# Altium PCB PCB_Kpad.PcbDoc
Units mm, origin at the board's own origin, x right, y up, seen from the top; angles counter-clockwise.
Board outline 94.26 x 100.27 mm, 2 copper layers (Top Layer, Bottom Layer), stack 1.534 mm thick; 22 components, 23 nets, 151 pads, 9 vias.
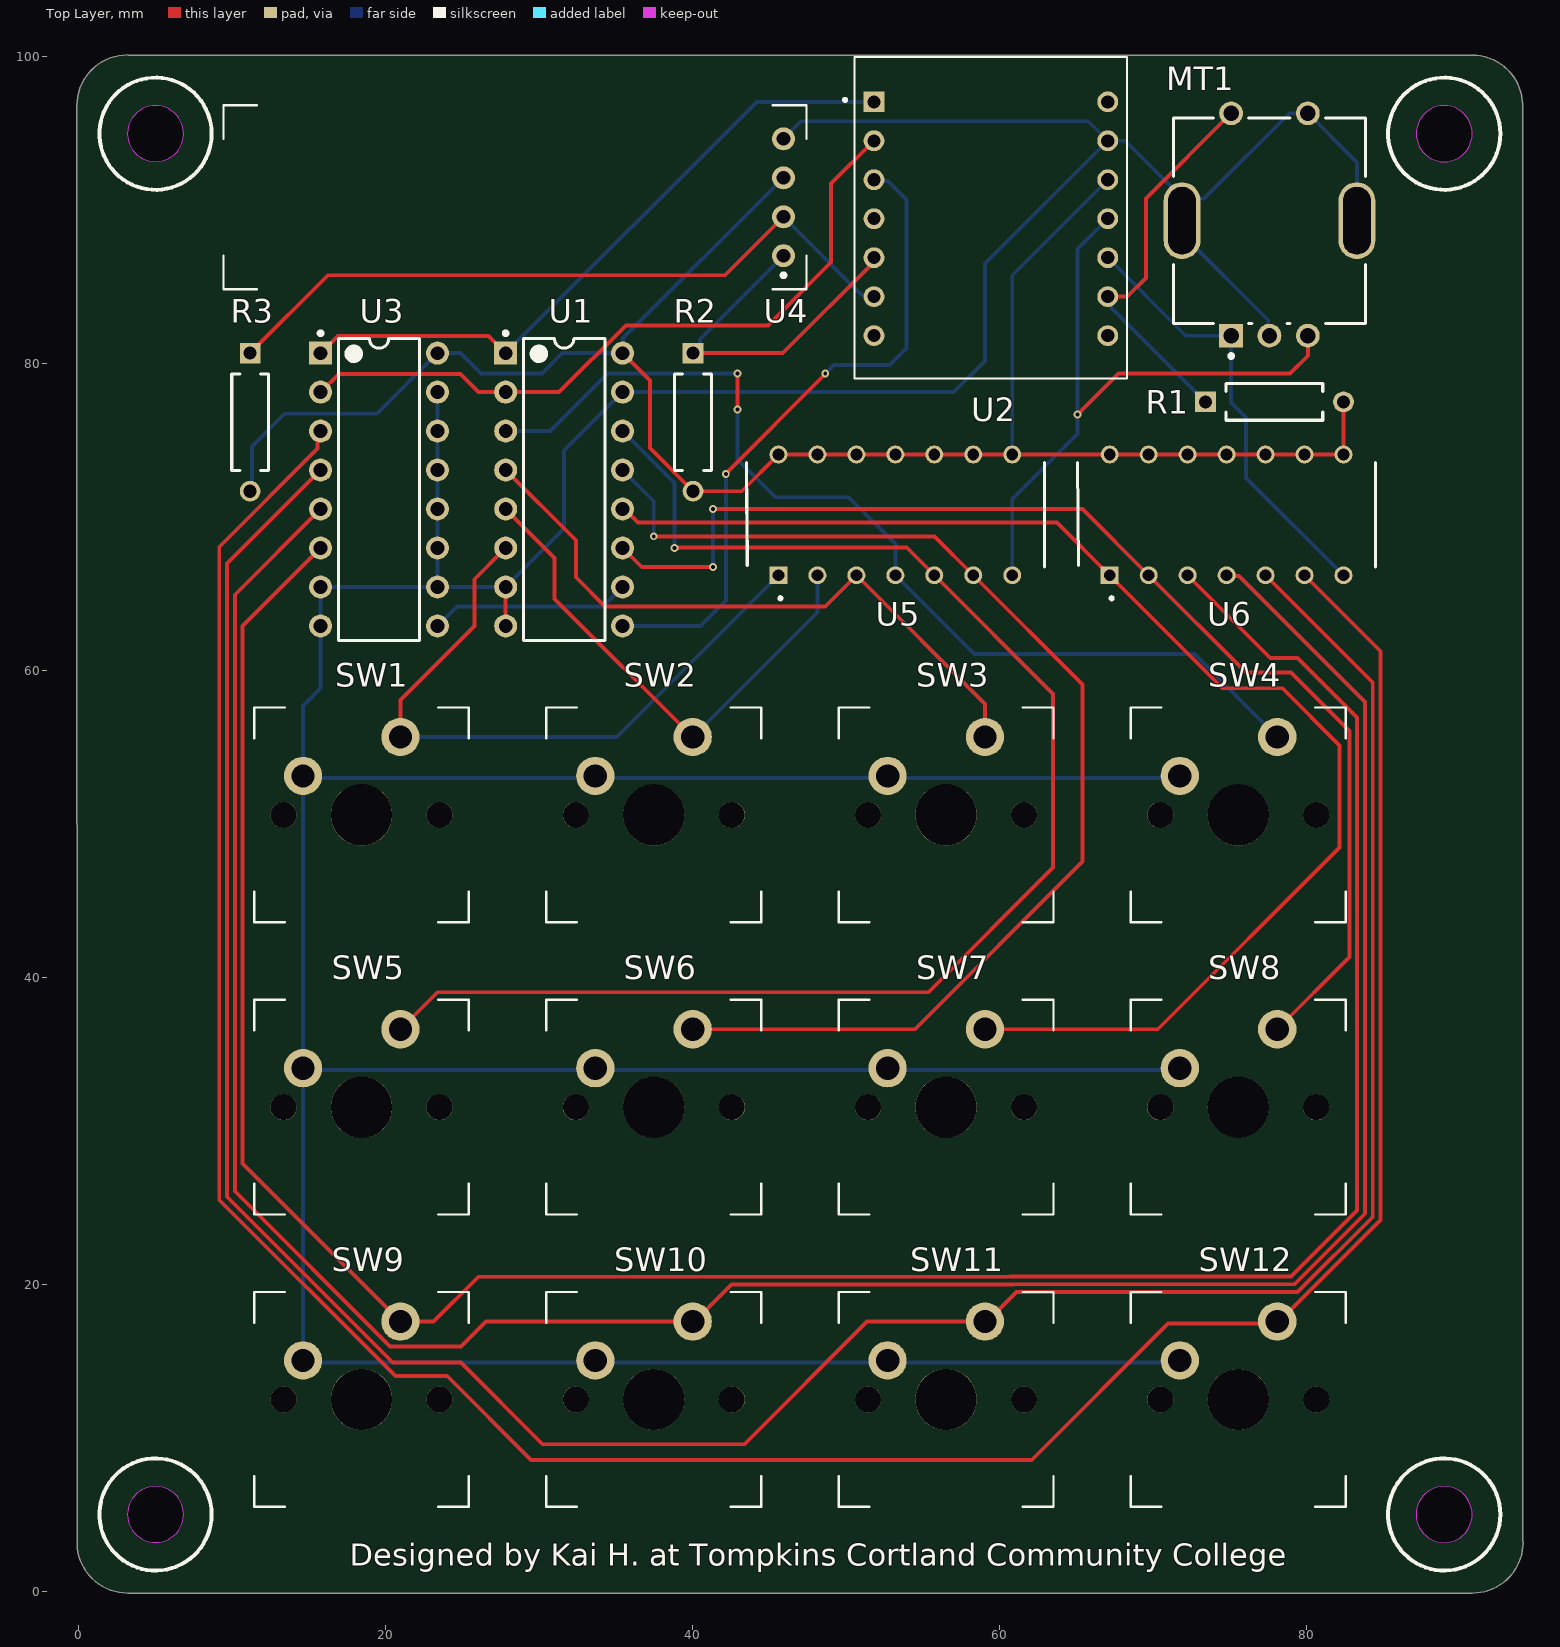
[diagram p0: Top Layer view]
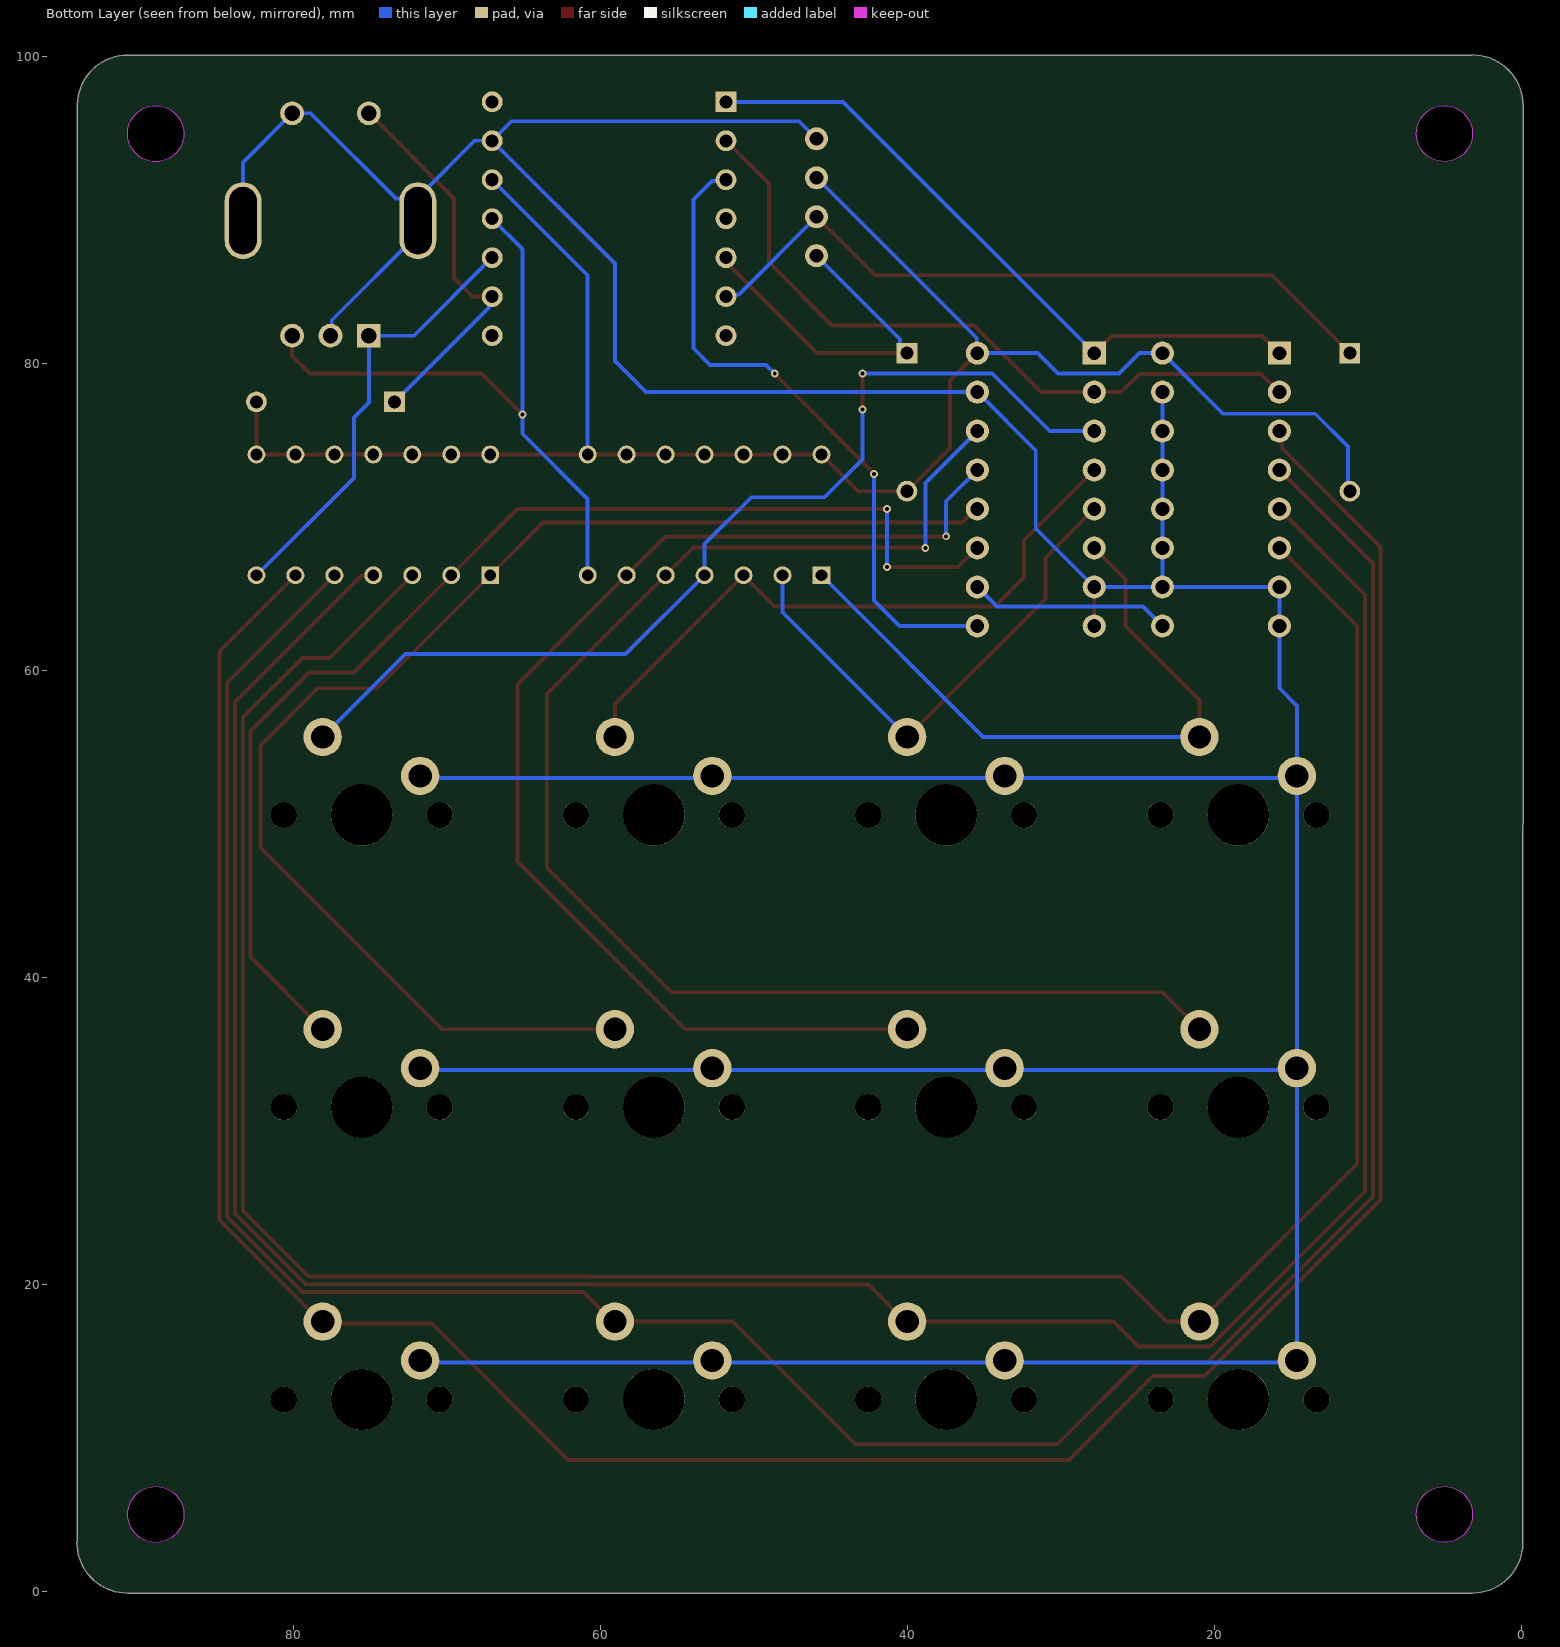
[diagram p1: Bottom Layer view, seen from below]

## Layer stack, top to bottom
Top Solder: solder mask 0.0127, Solder Resist, Dk 3.3
Top Layer: signal copper 0.0178
Dielectric1: core 1.4986, FR-4, Dk 4.3
Bottom Layer: signal copper 0.0178
Bottom Solder: solder mask 0.0127, Solder Resist, Dk 3.3

## Board outline
-0.116,3.122 ccw(c3.186,3.175) 3.184,-0.127 3.186,-0.127 90.835,-0.127 ccw(c90.835,3.175) 94.127,2.912 94.127,2.914 ccw(c90.835,3.175) 94.137,3.175 94.127,3.224 94.127,96.825 94.112,96.886 ccw(c90.81,96.825) 90.819,100.127 90.81,100.127 3.227,100.127 3.175,100.139 ccw(c3.175,96.837) -0.127,96.837
cut-out: 3.171,95.004 ccw(c5,95.004) 5,93.175 ccw(c5,95.004) 6.829,95.004 ccw(c5,95.004) 5,96.833 ccw(c5,95.004)
cut-out: 3.171,5.004 ccw(c5,5.004) 5,3.175 ccw(c5,5.004) 6.829,5.004 ccw(c5,5.004) 5,6.833 ccw(c5,5.004)
cut-out: 87.171,95 ccw(c89,95) 89,93.171 ccw(c89,95) 90.829,95 ccw(c89,95) 89,96.829 ccw(c89,95)
cut-out: 87.165,5 ccw(c88.994,5) 88.994,3.171 ccw(c88.994,5) 90.823,5 ccw(c88.994,5) 88.994,6.829 ccw(c88.994,5)

## Design rules (kind name [scope] priority, off if disabled: settings)
Clearance [All] p1: gap=0.254 ignorepadtopadclearanceinfootprint=FALSE
ComponentClearance ComponentClearance_1 [All] p1: gap=0.254 collisioncheckmode=3 verticalgap=0.254 showdistances=FALSE
DiffPairsRouting [All] p1: maxlimit=0.254 minlimit=0.254 mostfreqgap=0.254 toplayer_minwidth=0.254 toplayer_maxwidth=0.254 toplayer_prefwidth=0.254 bottomlayer_minwidth=0.254 bottomlayer_maxwidth=0.254 bottomlayer_prefwidth=0.254 maxuncoupledlength=12.7
HoleSize [All] p1: absolutevalues=TRUE maxlimit=7.62 minlimit=0.254 maxpercent=80.000 minpercent=20.000
MinimumAnnularRing [All] p1: minimumring=0.2
PasteMaskExpansion [All] p1: expansion=0.254
PlaneClearance [All] p1: clearance=0.381
PlaneConnect [All] p1: pad.planeconnectstyle=Relief pad.reliefexpansion=0.508 pad.reliefentries=4 pad.reliefconductorwidth=0.254 pad.reliefairgap=0.254 via.planeconnectstyle=Direct via.reliefexpansion=0.508 via.reliefentries=4 via.reliefconductorwidth=0.254 via.reliefairgap=0.254
PolygonConnect [All] p1: thpad.connectstyle=Relief thpad.reliefconductorwidth=0.254 thpad.reliefentries=4 thpad.polygonreliefangle="90 Angle" thpad.airgapwidth=0.254 smdpad.connectstyle=Relief smdpad.reliefconductorwidth=0.254 smdpad.reliefentries=4 smdpad.polygonreliefangle="90 Angle" smdpad.airgapwidth=0.254 via.connectstyle=Direct via.reliefconductorwidth=0.254 via.reliefentries=4 via.polygonreliefangle="90 Angle" via.airgapwidth=0.254
RoutingVias [All] p1: holewidth=0.254 width=0.508 viastyle="Through Hole" minholewidth=0.254 minwidth=0.508 maxholewidth=0.254 maxwidth=0.508
SMDNeckDown [All] p1: percent=100.000
SilkToSolderMaskClearance SilkscreenOverComponentPads [IsPad] p1: minsilkscreentomaskgap=0.254 clearancetoexposedcopper=TRUE
SolderMaskExpansion [All] p1: expansion=0.254 istentingtop=FALSE
Width [All] p1: maxlimit=0.254 minlimit=0.254 preferedwidth=0.254
23 further rules are at their usual default settings.

## Components (designator, comment, footprint, x,y, rotation, side; value= is the part's Value field where it differs from the comment)
MT1 "PEC11R-4215F-S0024" FP-PEC11R-4215F-S0024-MFG 77.607,89.332 r0 top
R1 "MFR-25FBF52-10K" RESA60-630X240 77.933,77.521 r0 top value=10k
R2 "MFR-25FBF52-10K" RESA60-630X240 40.035,76.196 r270 top value=10k
R3 "MFR-25FBF52-10K" RESA60-630X240 11.166,76.196 r270 top value=10k
SW1 "KS-8A10B055NW" KS-8A10B055NW-Footprint-1 18.425,50.597 r0 top
SW2 "KS-8A10B055NW" KS-8A10B055NW-Footprint-1 37.475,50.597 r0 top
SW3 "KS-8A10B055NW" KS-8A10B055NW-Footprint-1 56.525,50.597 r0 top
SW4 "KS-8A10B055NW" KS-8A10B055NW-Footprint-1 75.575,50.597 r0 top
SW5 "KS-8A10B055NW" KS-8A10B055NW-Footprint-1 18.425,31.547 r0 top
SW6 "KS-8A10B055NW" KS-8A10B055NW-Footprint-1 37.475,31.547 r0 top
SW7 "KS-8A10B055NW" KS-8A10B055NW-Footprint-1 56.525,31.547 r0 top
SW8 "KS-8A10B055NW" KS-8A10B055NW-Footprint-1 75.575,31.547 r0 top
SW9 "KS-8A10B055NW" KS-8A10B055NW-Footprint-1 18.425,12.497 r0 top
SW10 "KS-8A10B055NW" KS-8A10B055NW-Footprint-1 37.475,12.497 r0 top
SW11 "KS-8A10B055NW" KS-8A10B055NW-Footprint-1 56.525,12.497 r0 top
SW12 "KS-8A10B055NW" KS-8A10B055NW-Footprint-1 75.575,12.497 r0 top
U1 "SN74HC165N" TI-N0016A 31.633,71.806 r0 top
U2 "102010428" MODULE_102010428 59.446,89.459 r0 top
U3 "SN74HC165N" TI-N0016A 19.568,71.806 r0 top
U4 "8541549353" "New footprint 1" 45.93,87.046 r180 top
U5 "4114R-1-102LF" DIP794W45P254L1969H508Q14 53.223,70.153 r90 top value=1k
U6 "4114R-1-102LF" DIP794W45P254L1969H508Q14 74.813,70.153 r90 top value=1k

## Footprints (in the part's own frame and the unit in brackets; to place one, negate y for a bottom-side part, rotate by r counter-clockwise, add the part's x,y. Pads: shape width x height; smd on the part's side, far side on the other; paste and mask are expansions set on the pad)
DIP794W45P254L1969H508Q14 [mm]
  rect 1.17x1.17 / inner round 1.17 / far side rect 1.17x1.17 hole 0.77: 1(-3.935,7.62)
  round 1.17 hole 0.77: 2(-3.935,5.08) 3(-3.935,2.54) 4(-3.935,0) 5(-3.935,-2.54) 6(-3.935,-5.08) 7(-3.935,-7.62) 8(3.935,-7.62) 9(3.935,-5.08) 10(3.935,-2.54) 11(3.935,0) 12(3.935,2.54) 13(3.935,5.08) 14(3.935,7.62)
  silkscreen extent -5.54,-9.71 3.41,9.71, body extent -4.45,-9.72 4.19,9.71, height 4.64
FP-PEC11R-4215F-S0024-MFG [mm]
  round 1.55 hole 1 paste-2539.97 mask+0: 1(-2.5,7) 2(2.5,7) B(2.5,-7.5) C(0,-7.5)
  rrect100% 2.4x5 hole 4.4 slot 1.8 at 0 deg paste-2539.97 mask+0: 3(-5.7,0) 4(5.7,0)
  rect 1.55x1.55 hole 1 paste-2539.97 mask+0: A(-2.5,-7.5)
  silkscreen extent -6.25,-8.95 6.25,6.7, body extent -7,-8.37 7,7.88, height 0.25
KS-8A10B055NW-Footprint-1 [mm]
  round 2.5 hole 1.524: 1(-3.81,2.54) 2(2.54,5.08)
  round 1.7 hole 1.7 unplated mask+0: ""(-5.08,0) ""(5.08,0)
  round 4 hole 4 unplated mask+0: ""(0,0)
  silkscreen extent -7,-7 7,7
MODULE_102010428 [mm]
  rect 1.358x1.358 / inner round 1.358 / far side rect 1.358x1.358 hole 0.85: 1(-7.62,7.62)
  round 1.358 hole 0.85: 2(-7.62,5.08) 3(-7.62,2.54) 4(-7.62,0) 5(-7.62,-2.54) 6(-7.62,-5.08) 7(-7.62,-7.62) 8(7.62,-7.62) 9(7.62,-5.08) 10(7.62,-2.54) 11(7.62,0) 12(7.62,2.54) 13(7.62,5.08) 14(7.62,7.62)
  silkscreen extent -9.6,-10.41 8.89,10.54, body extent -8.89,-10.41 8.89,12.05, height 4.21
"New footprint 1" [mm]
  round 1.5 hole 0.9: S1(0,0) S2(0,-2.54) S3(0,-5.08) S4(0,-7.62)
  silkscreen extent -1.5,-9.81 36.5,2.19
RESA60-630X240 [mm] "Axial Resistor, 2-Leads, Dia 2.4mm, Body Length 6.3mm"
  rect 1.35x1.35 hole 0.85: 1(-4.5,0)
  round 1.35 hole 0.85: 2(4.5,0)
  silkscreen extent -3.15,-1.2 3.15,1.2, body extent -4.77,-1.19 4.77,1.2, height 2.4
TI-N0016A [mm] "DIP, 16-Leads, Body 19.7x6.6mm, Pitch 2.54mm"
  rect 1.5x1.5 hole 0.9: 1(-3.81,8.89)
  round 1.5 hole 0.9: 2(-3.81,6.35) 3(-3.81,3.81) 4(-3.81,1.27) 5(-3.81,-1.27) 6(-3.81,-3.81) 7(-3.81,-6.35) 8(-3.81,-8.89) 9(3.81,-8.89) 10(3.81,-6.35) 11(3.81,-3.81) 12(3.81,-1.27) 13(3.81,1.27) 14(3.81,3.81) 15(3.81,6.35) 16(3.81,8.89)
  silkscreen extent -3.93,-9.85 2.65,10.31, body extent -3.95,-9.85 3.95,9.85, height 5.08

## Part data
MT1: library part CMP-033-000000-5, "Incremental Encoder, 12 Mm, Contact Rating 10 Ma - 5 Vdc", Package=None, Availability=Unavailable, Component Type=Standard, Design Item ID=PEC11R-4215F-S0024, MP=PEC11R-4215F-S0024, Pin Count=7, Price=None, RoHS Compliant=Yes, Source=PEC11R-4215F-S0024.SchLib
R1 R2 R3: library part CMP-009-00047-4, "Axial Resistor, 10 KOhm, +/- 1%, 0.25 W, -55 to 155 degC, 2-Pin THD, RoHS, Bulk", Case/Package=Axial, Manufacturer=Yageo, Max Operating Temperature=155°C, Min Operating Temperature=-55°C, Package Description="2-Pin Axial Lead, Dia 2.4 mm, Body Length 6.3 mm", Package Quantity=200, Package Reference=MFR-25, Power=250mW, Tolerance=1%, Voltage Rating=250V, Datasheet URL=http://www.yageo.com/documents/recent/Yageo%20LR_MFR_2013.pdf, Datasheet Version=Apr-13, Manufacturer URL=http://www.yageo.com/, Mounting Technology=TH, Packaging=Bulk, RoHS Compliant=True
SW1 SW2 SW3 SW4 SW5 SW6 SW7 SW8 SW9 SW10 SW11 SW12: library part CMP-011-00015-11, "SPST momentary switch 15.40mmx15.40mm", Current Rating=10mA, Max Operating Temperature=80°C, Min Operating Temperature=-40°C, Voltage Rating=12V, ComponentLink1Description=Datasheet, ComponentLink1URL=https://gateron.com/u_file/2311/10/file/GATERONOilkingswitch-KS-8A10B055NW-D53.pdf, Max Current Rating=10mA, Mounting Technology=TH, Pins=4, Throw Configuration=SPST
U1 U3: library part CMP-016-00000-3, "Parallel-Load Shift Register, 8-Bit, 2 to 6 V, -40 to 125 degC, 16-Pin PDIP (N), Pb-Free (RoHS), Rail/Tube", Case/Package=PDIP, Manufacturer="Texas Instruments", Max Operating Temperature=85°C, Max Ouput Current=5.2mA, Max Supply Voltage=6V, Min Operating Temperature=-40°C, Min Supply Voltage=2V, Nominal Supply Voltage=5V, Package Description="16-Pin Plastic Double In-line Package, Body 19.305 x 6.35 mm, Pitch 2.54 mm", Package Quantity=25, Package Reference=PDIP-16, Package Version="4040049/E, 12/2002", Datasheet URL=http://www.ti.com/lit/ds/symlink/sn74hc165.pdf, Datasheet Version="SCLS116H, 12/2015", Direction=Unidirectional, Elements=1, Logic Function=ShiftRegister, Manufacturer URL=http://www.ti.com/, Mounting Technology=TH, Output Current=5.2mA, Package URL=http://www.ti.com/lit/ml/mpdi002c/mpdi002c.pdf, Packaging=Rail/Tube, Pins=16, Propagation Delay=150ns, RoHS Compliant=True
U2: library part CMP-031-000000-2, "RP2040 XIAO RP2040 series ARMÂ® CortexÂ®-M0+ MCU 32-Bit Embedded Evaluation Board", Package=None, Check_prices=https://www.snapeda.com/parts/102010428/Seeed+Technology+Co.%252C+Ltd/view-part/?ref=eda, Component Type=Standard, Design Item ID=102010428, MF="Seeed Technology Co., Ltd", MP=102010428, Pin Count=14, SnapEDA_Link=https://www.snapeda.com/parts/102010428/Seeed+Technology+Co.%252C+Ltd/view-part/?ref=snap, Source=102010428.SchLib
U4: library part CMP-003-000002-6, "MakerFocus 2pcs I2C OLED Display Module 0.91 Inch"
U5 U6: library part CMP-009-00186-1, "RES ARRAY 7 RES 1K OHM 14DIP", Case/Package=7731, Element Power Dissipation=250mW, First Element Resistance=1kR, Manufacturer 1=Bourns, Manufacturer Series=4100R, Max Operating Temperature=125°C, Min Operating Temperature=-55°C, Package=PDIP-14, Package Height=4.57mm, Package Length=19.43mm, Package Shape=Rectangular, Package Style=DIPMeter, Package Width=7.87mm, Rated Temperature=70°C, Resistor Type="ARRAY/NETWORK RESISTOR", Temperature Coefficient=100ppm/°C, Temperature Coefficient Tracking=50ppm/°C, Tolerance=2%, Working Voltage=100V, Channels=7, Check_prices=https://www.snapeda.com/parts/SN74LS90N/Texas%20Instruments/view-part/386057/?ref=eda, Component Type=Standard, ComponentLink1Description=Datasheet, ComponentLink1URL=https://www.bourns.com/docs/Product-Datasheets/4100R.pdf, Construction=Molded, Design Item ID=4114R-1-102LF, Digi-Key_Part_Number=4114R-1-102LF-ND, JESD-609 Code=e3, Lead Length=3.43mm, Lead Pitch=2.54mm, Manufacturer Part Number 1=4114R-1-102LF, Mounting Technology="Through Hole", Network Type=Isolated, Number of Elements=1, Pin Count=12, Pins=14, Power=250mW, Reach SVHC Compliant=No, RoHS Compliant=Yes, Series=4100R, Technology="METAL GLAZE/THICK FILM", Terminal Finish=Tin, Termination=Flat

## Via types
v1: diameter 0.508, hole 0.254, Top Layer to Bottom Layer, 9 vias

## Nets (pads, with @x,y where several pads share a name; then routed paths per layer and width w, separated by ;. In a path a pad name is that pad's centre, name@x,y a point inside that pad or via, vN(x,y) a via of type N, cw(c..) or ccw(c..) an arc to the next point about the centre after c; other vN are vias at no path point)
3V3: R1.2 R2.2 R3.2 U1.16 U2.12 U3.16 U4.S3 U5.8 U5.9 U5.10 U5.11 U5.12 U5.13 U5.14 U6.8 U6.9 U6.10 U6.11 U6.12 U6.13 U6.14 | length 124.7
  Top Layer w0.254: U1.16 37.221,78.918 37.221,74.51 R2.2 43.211,71.696 U5.14 U5.13 U5.12 U5.11 U5.10 U5.9 U5.8 U6.14 U6.13 U6.12 U6.11 U6.10 U6.9 U6.8 R1.2
  Bottom Layer w0.254: R3.2 11.295,71.825 11.295,74.625 13.417,76.747 19.429,76.747 U3.16 24.872,80.696 26.206,79.362 30.179,79.362 31.513,80.696 U1.16 35.482,80.735 35.482,81.678 U4.S3 ; U5.8 60.843,85.776 U2.12
CLK: U1.2 U2.2 U3.2 | length 46.8
  Top Layer w0.254: U3.2 16.948,79.346 24.874,79.346 26.064,78.156 U1.2 31.304,78.156 35.655,82.508 44.918,82.508 49.032,86.621 49.032,91.745 U2.2
ENC_CLK: MT1.A U2.10 U6.7 | length 28.8
  Bottom Layer w0.254: U2.10 72.153,81.832 MT1.A 75.107,77.488 76.083,76.512 76.083,72.568 U6.7
ENC_DT: MT1.B U2.11 U5.7 | length 43.7
  Top Layer w0.254: v1(65.098,76.696) 67.764,79.362 78.94,79.362 80.107,80.529 MT1.B
  Bottom Layer w0.254: U5.7 60.843,71.188 65.098,75.443 v1(65.098,76.696) 65.098,87.491 U2.11
ENC_SW: MT1.1 R1.1 U2.9 | length 25.5
  Top Layer w0.254: U2.9 68.336,84.379 69.559,85.602 69.559,90.784 MT1.1
  Bottom Layer w0.254: U2.9 67.277,84.168 67.277,83.677 R1.1
GND: MT1.2 MT1.3 MT1.4 MT1.C SW1.1 SW2.1 SW3.1 SW4.1 SW5.1 SW6.1 SW7.1 SW8.1 SW9.1 SW10.1 SW11.1 SW12.1 U1.7 U1.8 U1.15 U2.13 U3.7 U3.8 U3.10 U3.11 U3.12 U3.13 U3.14 U3.15 U4.S4 | length 367.6
  Top Layer w0.254: U1.8 U1.7
  Bottom Layer w0.254: SW5.1@14.615,33.96 SW9.1 14.742,14.91 33.538,14.91 SW10.1 33.792,14.91 52.588,14.91 SW11.1 52.842,14.91 71.638,14.91 SW12.1 ; SW1.1@14.615,53.01 SW5.1 14.742,33.96 33.538,33.96 SW6.1 33.792,33.96 52.588,33.96 SW7.1 52.842,33.96 71.638,33.96 SW8.1 ; U3.15@23.378,78.29 U3.15 U3.14 U3.13 U3.12 U3.11 U3.10 ; U4.S4 47.073,95.809 65.796,95.809 U2.13 ; SW4.1 71.638,53.01 52.842,53.01 SW3.1 52.588,53.01 33.792,53.01 SW2.1 33.538,53.01 14.742,53.01 SW1.1 14.615,57.709 15.758,58.852 U3.8 U3.7 U3.10 ; MT1.C 77.526,81.913 77.526,82.839 71.907,88.458 MT1.3 MT1.3@71.907,89.773 ; MT1.4 83.307,93.132 MT1.2 78.907,96.332 73.339,90.764 72.898,90.764 MT1.3@71.907,89.773 ; U3.10 U1.7 31.633,69.266 31.633,74.346 U1.15 57.029,78.156 59.065,80.192 59.065,86.538 U2.13 ; U2.13 68.209,94.539 71.907,90.841 MT1.3@71.907,89.773
LD: U1.1 U2.1 U3.1 | length 43.8
  Top Layer w0.254: U3.1 16.889,81.827 26.692,81.827 U1.1
  Bottom Layer w0.254: U1.1 44.206,97.079 U2.1
SCL: R3.1 U2.6 U4.S2 | length 46.5
  Top Layer w0.254: R3.1 16.245,85.775 42.119,85.775 U4.S2
  Bottom Layer w0.254: U4.S2 50.986,84.53 51.675,84.53 U2.6
SDA: R2.1 U2.5 U4.S1 | length 23.3
  Top Layer w0.254: R2.1 45.886,80.696 51.826,86.636 U2.5
  Bottom Layer w0.254: R2.1 40.487,81.148 40.487,81.603 U4.S1
SER: U1.10 U3.9 | length 13.1
  Bottom Layer w0.254: U3.9 24.648,64.186 34.173,64.186 U1.10
SH_Data: U1.9 U2.3 | length 43.2
  Top Layer w0.254: v1(42.174,72.822) 42.174,72.853 48.651,79.33 v1(48.651,79.362)
  Bottom Layer w0.254: U1.9 40.526,62.916 42.174,64.564 v1(42.174,72.822) ; v1(48.651,79.362) 49.223,79.934 52.86,79.934 53.941,81.015 53.941,90.704 52.732,91.914 51.911,91.914 U2.3
SW1: SW1.2 U1.6 U5.1 | length 44.2
  Top Layer w0.254: SW1.2 20.965,58.09 25.784,62.909 25.784,65.957 U1.6
  Bottom Layer w0.254: SW1.2 35.062,55.677 U5.1
SW2: SW2.2 U1.5 U5.2 | length 33.8
  Top Layer w0.254: U1.5 31.01,67.349 31.01,64.682 SW2.2
  Bottom Layer w0.254: SW2.2 48.143,63.805 U5.2
SW3: SW3.2 U1.4 U5.3 | length 42.8
  Top Layer w0.254: U1.4 32.395,68.504 32.395,66.091 34.3,64.186 48.651,64.186 U5.3 59.065,57.836 SW3.2
SW4: SW4.2 U1.3 U5.4 | length 66.1
  Top Layer w0.254: v1(42.936,77.021) v1(42.936,79.362)
  Bottom Layer w0.254: U1.3 30.724,75.616 34.47,79.362 v1(42.936,79.362) ; v1(42.936,77.021) 42.936,73.771 45.401,71.306 50.171,71.306 53.223,68.254 U5.4 58.366,61.075 72.717,61.075 SW4.2
SW5: SW5.2 U1.14 U5.5 | length 95.9
  Top Layer w0.254: SW5.2 23.378,39.04 55.382,39.04 63.51,47.168 63.51,58.471 U5.5 53.963,68.018 38.857,68.018 v1(38.835,67.996)
  Bottom Layer w0.254: U1.14 38.835,72.224 v1(38.835,67.996)
SW6: SW6.2 U1.13 U5.6 | length 78.6
  Top Layer w0.254: v1(37.475,68.758) 55.763,68.758 U5.6 65.415,59.106 65.415,47.549 54.493,36.627 SW6.2
  Bottom Layer w0.254: U1.13 37.475,71.044 v1(37.475,68.758)
SW7: SW7.2 U1.12 U6.1 | length 87.8
  Top Layer w0.254: U1.12 35.562,70.536 36.451,69.647 63.764,69.647 U6.1 74.559,58.852 78.446,58.852 82.179,55.119 82.179,48.478 70.328,36.627 SW7.2
SW8: SW8.2 U1.11 U6.2 | length 79.1
  Top Layer w0.254: U1.11 36.691,66.748 v1(41.335,66.748) ; v1(41.335,70.536) 42.936,70.536 65.415,70.536 U6.2 76.083,59.868 79.004,59.868 82.814,56.058 82.814,41.326 SW8.2
  Bottom Layer w0.254: v1(41.335,66.748) v1(41.335,70.536)
SW9: SW9.2 U3.6 U6.3 | length 169.2
  Top Layer w0.254: U3.6 10.678,62.916 10.678,27.864 SW9.2 23.124,17.577 26.045,20.498 60.676,20.498 60.691,20.513 79.023,20.513 83.322,24.812 83.322,56.947 79.434,60.835 77.656,60.835 U6.3
SW10: SW10.2 U3.5 U6.4 | length 174
  Top Layer w0.254: U3.5 10.17,64.948 10.17,26.065 20.289,15.946 24.922,15.946 26.553,17.577 SW10.2 40.142,17.577 42.555,19.99 60.887,19.99 60.902,20.005 79.233,20.005 83.83,24.602 83.83,57.963 75.623,66.17 74.861,66.17 U6.4
SW11: SW11.2 U3.4 U6.5 | length 182.2
  Top Layer w0.254: U3.4 9.662,66.98 9.662,25.708 20.46,14.91 24.902,14.91 30.236,9.576 43.383,9.576 51.384,17.577 SW11.2@59.192,17.577 ; SW11.2 SW11.2@59.192,17.577 ; U6.5 84.338,59.233 84.338,24.391 79.444,19.497 61.112,19.497 SW11.2@59.192,17.577
SW12: SW12.2 U3.3 U6.6 | length 186.1
  Top Layer w0.254: U3.3 15.568,75.426 15.568,74.485 9.154,68.071 9.154,25.498 20.631,14.021 24.013,14.021 29.474,8.56 62.113,8.56 71.003,17.45 77.988,17.45 SW12.2 78.242,17.577 84.846,24.181 84.846,61.265 U6.6
pads on no net: SW1. SW2. SW3. SW4. SW5. SW6. SW7. SW8. SW9. SW10. SW11. SW12. U2.4 U2.7 U2.8 U2.14

## Silkscreen, mask and mechanical layers (free items; w line width, h text height)
Top Overlay:
  circle w0.254: c5,95 r3.658
  circle w0.254: c5,5 r3.658
  circle w0.254: c89,95 r3.658
  circle w0.254: c89,5 r3.658
  text "Designed by Kai H. at Tompkins Cortland Community College" at 17.663,1.172 h2.5
Board:
  lines w0.254: 0,3.175 0,96.837 cw(c3.175,96.837) 3.175,100.011 ; 0.011,3.175 ccw(c3.186,3.175) 3.186,0 90.835,0 ccw(c90.835,3.175) 94.01,3.175 ; 2.905,100 90.81,100 cw(c90.81,96.825) 93.985,96.825 ; 94,2.923 94,96.825
Drill Drawing:
  circle w0.35: c117.268,74.378 r0.847
  lines w0.35: 116.421,66.758 117.268,65.911 118.115,66.758 117.268,67.605 116.421,66.758 ; 116.421,71.415 118.115,71.415 117.268,69.721 116.421,71.415 ; 116.421,77.341 118.115,77.341 118.115,79.035 116.421,79.035 116.421,77.341 ; 116.421,81.151 116.421,81.575 116.845,81.998 116.421,82.421 116.421,82.845 116.845,82.845 117.268,82.421 117.691,82.845 118.115,82.845 118.115,82.421 117.691,81.998 118.115,81.575 118.115,81.151 117.691,81.151 117.268,81.575 116.845,81.151 116.421,81.151 ; 116.421,84.961 117.268,85.385 118.115,84.961 117.691,85.808 118.115,86.655 117.268,86.231 116.421,86.655 116.845,85.808 116.421,84.961 ; 116.421,89.195 116.845,89.195 116.845,88.771 117.691,88.771 117.691,89.195 118.115,89.195 118.115,90.041 117.691,90.041 117.691,90.465 116.845,90.465 116.845,90.041 116.421,90.041 116.421,89.195 ; 116.421,93.005 116.845,93.005 117.268,92.581 117.691,93.005 118.115,93.005 117.691,93.428 118.115,93.851 117.691,93.851 117.268,94.275 116.845,93.851 116.421,93.851 116.845,93.428 116.421,93.005 ; 116.421,96.391 118.115,96.391 118.115,98.085 116.421,98.085 116.421,96.391 ; 116.76,96.73 117.776,96.73 117.776,97.746 116.76,97.746 116.76,96.73
  lines w0.381: 114.873,64.768 288.425,64.768 ; 114.873,99.058 288.425,99.058 ; 129.172,60.958 129.172,102.868 ; 144.346,60.958 144.346,102.868 ; 173.74,60.958 173.74,102.868 ; 186.896,60.958 186.896,102.868 ; 205.842,60.958 205.842,102.868 ; 244.122,60.958 244.122,102.868 ; 259.412,60.958 259.412,102.868 ; 114.873,60.958 288.425,60.958 288.425,102.868 114.873,102.868 114.873,60.958
  text "Symbol" at 117.159,100.201 h1.83
  text "Count" at 130.315,100.201 h1.83
  text "Hole Size" at 145.489,100.201 h1.83
  text "Plated" at 174.883,100.201 h1.83
  text "Hole Type" at 188.039,100.201 h1.83
  text "Drill Layer Pair" at 206.985,100.201 h1.83
  text "Via/Pad" at 245.265,100.201 h1.83
  text "Pad Shape" at 260.555,100.201 h1.83
  text "9" at 130.315,96.391 h1.52
  text "0.254mm (10.00mil)" at 145.489,96.391 h1.52
  text "PTH" at 174.883,96.391 h1.52
  text "Round" at 188.039,96.391 h1.52
  text "Top Layer - Bottom Layer" at 206.985,96.391 h1.52
  text "Via" at 245.265,96.391 h1.52
  text "Rounded" at 260.555,96.391 h1.52
  text "28" at 130.315,92.581 h1.52
  text "0.770mm (30.32mil)" at 145.489,92.581 h1.52
  text "PTH" at 174.883,92.581 h1.52
  text "Round" at 188.039,92.581 h1.52
  text "Top Layer - Bottom Layer" at 206.985,92.581 h1.52
  text "Pad" at 245.265,92.581 h1.52
  text "Rounded" at 260.555,92.581 h1.52
  text "20" at 130.315,88.771 h1.52
  text "0.850mm (33.47mil)" at 145.489,88.771 h1.52
  text "PTH" at 174.883,88.771 h1.52
  text "Round" at 188.039,88.771 h1.52
  text "Top Layer - Bottom Layer" at 206.985,88.771 h1.52
  text "Pad" at 245.265,88.771 h1.52
  text "(Mixed)" at 260.555,88.771 h1.52
  text "36" at 130.315,84.961 h1.52
  text "0.900mm (35.43mil)" at 145.489,84.961 h1.52
  text "PTH" at 174.883,84.961 h1.52
  text "Round" at 188.039,84.961 h1.52
  text "Top Layer - Bottom Layer" at 206.985,84.961 h1.52
  text "Pad" at 245.265,84.961 h1.52
  text "(Mixed)" at 260.555,84.961 h1.52
  text "5" at 130.315,81.151 h1.52
  text "1.000mm (39.37mil)" at 145.489,81.151 h1.52
  text "PTH" at 174.883,81.151 h1.52
  text "Round" at 188.039,81.151 h1.52
  text "Top Layer - Bottom Layer" at 206.985,81.151 h1.52
  text "Pad" at 245.265,81.151 h1.52
  text "(Mixed)" at 260.555,81.151 h1.52
  text "24" at 130.315,77.341 h1.52
  text "1.524mm (60.00mil)" at 145.489,77.341 h1.52
  text "PTH" at 174.883,77.341 h1.52
  text "Round" at 188.039,77.341 h1.52
  text "Top Layer - Bottom Layer" at 206.985,77.341 h1.52
  text "Pad" at 245.265,77.341 h1.52
  text "Rounded" at 260.555,77.341 h1.52
  text "24" at 130.315,73.531 h1.52
  text "1.700mm (66.93mil)" at 145.489,73.531 h1.52
  text "NPTH" at 174.883,73.531 h1.52
  text "Round" at 188.039,73.531 h1.52
  text "Top Layer - Bottom Layer" at 206.985,73.531 h1.52
  text "Pad" at 245.265,73.531 h1.52
  text "Rounded" at 260.555,73.531 h1.52
  text "12" at 130.315,69.721 h1.52
  text "4.000mm (157.48mil)" at 145.489,69.721 h1.52
  text "NPTH" at 174.883,69.721 h1.52
  text "Round" at 188.039,69.721 h1.52
  text "Top Layer - Bottom Layer" at 206.985,69.721 h1.52
  text "Pad" at 245.265,69.721 h1.52
  text "Rounded" at 260.555,69.721 h1.52
  text "2" at 130.315,65.911 h1.52
  text "4.400mm (173.23mil)" at 145.489,65.911 h1.52
  text "PTH" at 174.883,65.911 h1.52
  text "Slot" at 188.039,65.911 h1.52
  text "Top Layer - Bottom Layer" at 206.985,65.911 h1.52
  text "Pad" at 245.265,65.911 h1.52
  text "Rounded Rectangle" at 260.555,65.911 h1.52
  text "160 Total" at 130.315,62.101 h1.52
  text "Slot definitions :" at 117.159,58.227 h1.52
  text "Routed Path Length" at 143.658,58.227 h1.52
  text "= Calculated from tool start centre position to tool end centre position." at 171.934,58.227 h1.52
  text "Hole Length" at 143.658,55.496 h1.52
  text "= Routed Path Length + Tool Size = Slot length as defined in the PCB layout" at 161.524,55.496 h1.52
Fab Notes:
  lines w0.025: 202.678,24.66 205.153,27.135 208.201,30.183 211.249,33.231 214.297,36.279 215.821,37.803 ; 202.678,26.184 203.629,27.135 206.677,30.183 209.725,33.231 212.773,36.279 215.821,39.327 ; 202.678,27.708 205.153,30.183 208.201,33.231 211.249,36.279 214.297,39.327 215.821,40.851 ; 202.678,29.232 203.629,30.183 206.677,33.231 209.725,36.279 212.773,39.327 215.821,42.375 ; 202.678,30.756 205.153,33.231 208.201,36.279 211.249,39.327 214.297,42.375 215.821,43.899 ; 202.678,32.28 203.629,33.231 206.677,36.279 209.725,39.327 212.773,42.375 215.821,45.423 ; 202.678,33.804 205.153,36.279 208.201,39.327 211.249,42.375 214.297,45.423 ; 202.678,35.328 203.629,36.279 206.677,39.327 209.725,42.375 212.773,45.423 ; 202.678,36.852 205.153,39.327 208.201,42.375 211.249,45.423 ; 202.678,38.376 203.629,39.327 206.677,42.375 209.725,45.423 ; 202.678,39.9 205.153,42.375 208.201,45.423 ; 202.678,41.424 203.629,42.375 206.677,45.423 ; 202.678,42.948 205.153,45.423 ; 202.678,44.472 203.629,45.423 ; 203.629,24.087 206.677,27.135 209.725,30.183 212.773,33.231 215.821,36.279 ; 205.153,24.087 208.201,27.135 211.249,30.183 214.297,33.231 215.821,34.755 ; 206.677,24.087 209.725,27.135 212.773,30.183 215.821,33.231 ; 208.201,24.087 211.249,27.135 214.297,30.183 215.821,31.707 ; 209.725,24.087 212.773,27.135 215.821,30.183 ; 211.249,24.087 214.297,27.135 215.821,28.659 ; 212.773,24.087 215.821,27.135 ; 214.297,24.087 215.821,25.611
  lines w0.381: 114.873,27.135 125.476,27.135 149.284,27.135 171.314,27.135 188.012,27.135 202.678,27.135 215.821,27.135 ; 114.873,30.183 125.476,30.183 149.284,30.183 171.314,30.183 188.012,30.183 202.678,30.183 215.821,30.183 ; 114.873,33.231 125.476,33.231 149.284,33.231 171.314,33.231 188.012,33.231 202.678,33.231 215.821,33.231 ; 114.873,36.279 125.476,36.279 149.284,36.279 171.314,36.279 188.012,36.279 202.678,36.279 215.821,36.279 ; 114.873,39.327 125.476,39.327 149.284,39.327 171.314,39.327 188.012,39.327 202.678,39.327 215.821,39.327 ; 114.873,42.375 125.476,42.375 149.284,42.375 171.314,42.375 188.012,42.375 202.678,42.375 215.821,42.375 ; 114.873,45.423 215.821,45.423 ; 125.476,48.471 125.476,24.087 ; 149.284,48.471 149.284,24.087 ; 171.314,48.471 171.314,24.087 ; 188.012,48.471 188.012,24.087 ; 202.678,48.471 202.678,24.087 ; 125.476,24.087 114.873,24.087 114.873,48.471 215.821,48.471 215.821,24.087 202.678,24.087 ; 125.476,24.087 149.284,24.087 ; 149.284,24.087 171.314,24.087 ; 171.314,24.087 188.012,24.087 ; 188.012,24.087 202.678,24.087
  text "Layer" at 116.747,46.185 h1.52
  text "Name" at 127.35,46.185 h1.52
  text "Material" at 151.158,46.185 h1.52
  text "Thickness" at 173.188,46.185 h1.52
  text "Constant" at 189.886,46.185 h1.52
  text "Rigid" at 204.552,46.185 h1.52
  text "Top Overlay" at 127.35,43.137 h1.52
  text "Top Solder" at 127.35,40.089 h1.52
  text "Solder Resist" at 151.158,40.089 h1.52
  text "0.013mm" at 173.188,40.089 h1.52
  text "3.3" at 189.886,40.089 h1.52
  text "1" at 116.747,37.041 h1.52
  text "Top Layer" at 127.35,37.041 h1.52
  text "0.018mm" at 173.188,37.041 h1.52
  text "Dielectric1" at 127.35,33.993 h1.52
  text "FR-4" at 151.158,33.993 h1.52
  text "1.499mm" at 173.188,33.993 h1.52
  text "4.3" at 189.886,33.993 h1.52
  text "2" at 116.747,30.945 h1.52
  text "Bottom Layer" at 127.35,30.945 h1.52
  text "0.018mm" at 173.188,30.945 h1.52
  text "Bottom Solder" at 127.35,27.897 h1.52
  text "Solder Resist" at 151.158,27.897 h1.52
  text "0.013mm" at 173.188,27.897 h1.52
  text "3.3" at 189.886,27.897 h1.52
  text "Bottom Overlay" at 127.35,24.849 h1.52

## Dimensions
90.81,100 to 90.835,0 on Dimensions
94,96.825 to 0,96.837 on Dimensions